# Altium PCB 数粒机接收板12通道.PcbDoc (part 2 of 2)
Units mm, origin at the board's own origin, x right, y up, seen from the top; angles counter-clockwise.
Board outline 316 x 52 mm, 2 copper layers (Top Layer, Bottom Layer); 209 components, 115 nets, 614 pads, 284 vias.
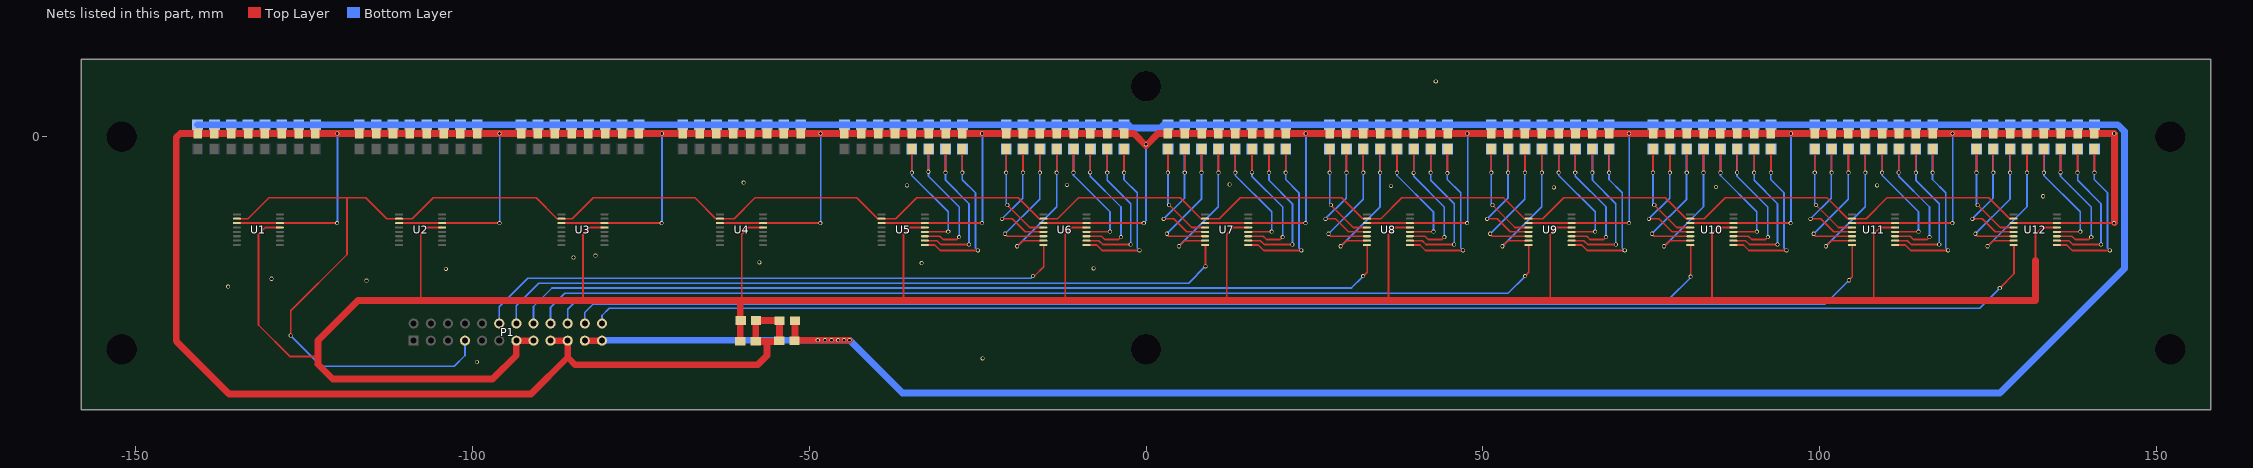
[diagram p2: the nets of this part, all layers, seen from the top]

## Via types
v1: diameter 0.6, hole 0.4, Top Layer to Bottom Layer, 284 vias

## Nets (pads, with @x,y where several pads share a name; then routed paths per layer and width w, separated by ;. In a path a pad name is that pad's centre, name@x,y a point inside that pad or via, vN(x,y) a via of type N, cw(c..) or ccw(c..) an arc to the next point about the centre after c; other vN are vias at no path point) (continued)
CH5-5: D37.1 R37.2 U5.12 | length 21.2
  Top Layer w0.254: v1(-34.75,-5.309) R37.2@-34.75,-1.8 ; U5.12@-32.776,-14.1 -29.371,-14.1 v1(-29.346,-14.076)
  Bottom Layer w0.254: D37.1@-34.745,-2.05 -34.745,-5.73 -29.346,-11.129 v1(-29.346,-14.076)
CH5-6: D38.1 R38.2 U5.11 | length 23.6
  Top Layer w0.254: U5.11@-32.776,-14.75 -30.602,-14.75 -30.108,-15.244 -28.076,-15.244 v1(-27.721,-14.888) ; v1(-32.309,-5.182) -32.309,-1.859 R38.2@-32.25,-1.8
  Bottom Layer w0.254: D38.1@-32.282,-2.013 -32.283,-2.015 -32.283,-5.855 -27.721,-10.418 v1(-27.721,-14.888)
CH5-7: D39.1 R39.2 U5.10 | length 25.6
  Top Layer w0.254: U5.10@-32.776,-15.4 -31.019,-15.4 -30.439,-15.981 v1(-26.273,-15.981) ; v1(-29.75,-5.309) R39.2@-29.75,-1.8
  Bottom Layer w0.254: D39.1@-29.742,-2.053 -29.742,-6.441 -26.273,-9.91 v1(-26.273,-15.981)
CH5-8: D40.1 R40.2 U5.9 | length 27.5
  Top Layer w0.254: U5.9@-32.776,-16.05 -31.334,-16.05 -30.515,-16.87 -24.978,-16.87 v1(-24.952,-16.844) ; v1(-27.25,-5.309) R40.2@-27.25,-1.8
  Bottom Layer w0.254: D40.1@-27.278,-2.017 -27.254,-2.041 -27.254,-6.363 -25.308,-8.31 -25.308,-16.489 v1(-24.952,-16.844)
CH6: P1.12 U6.8 | length 89
  Top Layer w0.254: v1(-16.759,-20.647) -16.556,-20.647 -15.176,-19.267 -15.176,-16.101 U6.8@-15.227,-16.05
  Bottom Layer w0.254: P1.12@-95.982,-27.708 -95.982,-25.219 -91.769,-21.006 -17.118,-21.006 v1(-16.759,-20.647)
CH6-1: D41.1 R41.2 U6.4 | length 18.6
  Top Layer w0.254: v1(-20.75,-5.309) R41.2@-20.75,-1.8 ; v1(-20.571,-10.111) -17.231,-13.45 U6.4@-15.227,-13.45
  Bottom Layer w0.254: D41.1@-20.75,-1.8 -20.75,-9.931 v1(-20.571,-10.111)
CH6-2: D42.1 R42.2 U6.5 | length 21.8
  Top Layer w0.254: v1(-21.374,-12.171) -19.875,-12.171 -17.946,-14.1 U6.5@-15.227,-14.1 ; v1(-18.25,-5.309) R42.2@-18.25,-1.8
  Bottom Layer w0.254: v1(-21.374,-12.171) -18.289,-9.086 D42.1@-18.289,-2.057
CH6-3: D43.1 R43.2 U6.6 | length 23.8
  Top Layer w0.254: v1(-20.917,-14.38) -20.917,-14.431 -20.598,-14.75 U6.6@-15.227,-14.75 ; v1(-15.75,-5.309) R43.2@-15.75,-1.8
  Bottom Layer w0.254: v1(-20.917,-14.38) -15.775,-9.238 D43.1@-15.775,-2.071
CH6-4: D44.1 R44.2 U6.7 | length 24.3
  Top Layer w0.254: v1(-19.113,-16.237) -18.276,-15.4 U6.7@-15.227,-15.4 ; v1(-13.25,-5.309) R44.2@-13.25,-1.8
  Bottom Layer w0.254: v1(-19.113,-16.237) -13.26,-10.383 D44.1@-13.26,-2.086
CH6-5: D45.1 R45.2 U6.12 | length 21.2
  Top Layer w0.254: v1(-10.75,-5.309) R45.2@-10.75,-1.8 ; U6.12@-8.776,-14.1 -5.371,-14.1 v1(-5.346,-14.076)
  Bottom Layer w0.254: D45.1@-10.745,-2.05 -10.745,-5.73 -5.346,-11.129 v1(-5.346,-14.076)
CH6-6: D46.1 R46.2 U6.11 | length 23.6
  Top Layer w0.254: U6.11@-8.776,-14.75 -6.602,-14.75 -6.108,-15.244 -4.076,-15.244 v1(-3.721,-14.888) ; v1(-8.28,-5.258) -8.28,-1.83 R46.2@-8.25,-1.8
  Bottom Layer w0.254: D46.1@-8.282,-2.013 -8.282,-5.857 -3.721,-10.418 v1(-3.721,-14.888)
CH6-7: D47.1 R47.2 U6.10 | length 25.6
  Top Layer w0.254: U6.10@-8.776,-15.4 -7.019,-15.4 -6.439,-15.981 v1(-2.273,-15.981) ; v1(-5.75,-5.309) R47.2@-5.75,-1.8
  Bottom Layer w0.254: D47.1@-5.742,-2.053 -5.742,-6.441 -2.273,-9.91 v1(-2.273,-15.981)
CH6-8: D48.1 R48.2 U6.9 | length 27.5
  Top Layer w0.254: U6.9@-8.776,-16.05 -7.334,-16.05 -6.515,-16.87 -0.978,-16.87 v1(-0.952,-16.844) ; v1(-3.25,-5.309) R48.2@-3.25,-1.8
  Bottom Layer w0.254: D48.1@-3.278,-2.017 -3.278,-6.34 -1.308,-8.31 -1.308,-16.489 v1(-0.952,-16.844)
CH7: P1.14 U7.8 | length 110.5
  Top Layer w0.254: U7.8@8.773,-16.05 8.824,-16.101 8.824,-18.292 8.819,-18.297 v1(8.819,-19.224)
  Bottom Layer w0.254: P1.14@-93.442,-27.708 -93.442,-25.041 -90.115,-21.714 6.329,-21.714 v1(8.819,-19.224)
CH7-1: D49.1 R49.2 U7.4 | length 18.6
  Top Layer w0.254: v1(3.25,-5.309) R49.2@3.25,-1.8 ; v1(3.429,-10.111) 6.769,-13.45 U7.4@8.773,-13.45
  Bottom Layer w0.254: D49.1@3.25,-1.8 3.25,-9.931 v1(3.429,-10.111)
CH7-2: D50.1 R50.2 U7.5 | length 21.8
  Top Layer w0.254: v1(2.626,-12.171) 4.125,-12.171 6.054,-14.1 U7.5@8.773,-14.1 ; v1(5.75,-5.309) R50.2@5.75,-1.8
  Bottom Layer w0.254: v1(2.626,-12.171) 5.711,-9.086 D50.1@5.711,-2.057
CH7-3: D51.1 R51.2 U7.6 | length 23.8
  Top Layer w0.254: v1(3.083,-14.38) 3.083,-14.431 3.402,-14.75 U7.6@8.773,-14.75 ; v1(8.25,-5.309) R51.2@8.25,-1.8
  Bottom Layer w0.254: v1(3.083,-14.38) 8.225,-9.238 D51.1@8.225,-2.071
CH7-4: D52.1 R52.2 U7.7 | length 24.3
  Top Layer w0.254: v1(4.887,-16.237) 5.724,-15.4 U7.7@8.773,-15.4 ; v1(10.75,-5.309) R52.2@10.75,-1.8
  Bottom Layer w0.254: v1(4.887,-16.237) 10.74,-10.383 D52.1@10.74,-2.086
CH7-5: D53.1 R53.2 U7.12 | length 21.2
  Top Layer w0.254: v1(13.25,-5.309) R53.2@13.25,-1.8 ; U7.12@15.224,-14.1 18.629,-14.1 v1(18.654,-14.076)
  Bottom Layer w0.254: D53.1@13.255,-2.05 13.255,-5.73 18.654,-11.129 v1(18.654,-14.076)
CH7-6: D54.1 R54.2 U7.11 | length 23.6
  Top Layer w0.254: U7.11@15.224,-14.75 17.398,-14.75 17.892,-15.244 19.924,-15.244 v1(20.279,-14.888) ; v1(15.723,-5.258) 15.723,-1.827 R54.2@15.75,-1.8
  Bottom Layer w0.254: D54.1@15.718,-2.013 15.718,-5.857 20.279,-10.418 v1(20.279,-14.888)
CH7-7: D55.1 R55.2 U7.10 | length 25.6
  Top Layer w0.254: U7.10@15.224,-15.4 16.981,-15.4 17.561,-15.981 v1(21.727,-15.981) ; v1(18.25,-5.309) R55.2@18.25,-1.8
  Bottom Layer w0.254: D55.1@18.258,-2.053 18.258,-6.441 21.727,-9.91 v1(21.727,-15.981)
CH7-8: D56.1 R56.2 U7.9 | length 27.5
  Top Layer w0.254: U7.9@15.224,-16.05 16.666,-16.05 17.485,-16.87 23.022,-16.87 v1(23.048,-16.844) ; v1(20.726,-5.309) 20.726,-1.824 R56.2@20.75,-1.8
  Bottom Layer w0.254: D56.1@20.722,-2.017 20.722,-6.34 22.692,-8.31 22.692,-16.489 v1(23.048,-16.844)
CH8: P1.16 U8.8 | length 132.4
  Top Layer w0.254: v1(32.237,-20.672) 32.824,-20.086 32.824,-16.101 U8.8@32.773,-16.05
  Bottom Layer w0.254: P1.16@-90.902,-27.708 -90.902,-25.168 -88.159,-22.425 30.485,-22.425 v1(32.237,-20.672)
CH8-1: D57.1 R57.2 U8.4 | length 18.6
  Top Layer w0.254: v1(27.25,-5.309) R57.2@27.25,-1.8 ; v1(27.429,-10.111) 30.769,-13.45 U8.4@32.773,-13.45
  Bottom Layer w0.254: D57.1@27.25,-1.8 27.25,-9.931 v1(27.429,-10.111)
CH8-2: D58.1 R58.2 U8.5 | length 21.8
  Top Layer w0.254: v1(26.626,-12.171) 28.125,-12.171 30.054,-14.1 U8.5@32.773,-14.1 ; v1(29.75,-5.309) R58.2@29.75,-1.8
  Bottom Layer w0.254: v1(26.626,-12.171) 29.711,-9.086 D58.1@29.711,-2.057
CH8-3: D59.1 R59.2 U8.6 | length 23.8
  Top Layer w0.254: v1(27.083,-14.38) 27.083,-14.431 27.402,-14.75 U8.6@32.773,-14.75 ; v1(32.25,-5.309) R59.2@32.25,-1.8
  Bottom Layer w0.254: v1(27.083,-14.38) 32.225,-9.238 D59.1@32.225,-2.071
CH8-4: D60.1 R60.2 U8.7 | length 24.3
  Top Layer w0.254: v1(28.887,-16.237) 29.724,-15.4 U8.7@32.773,-15.4 ; v1(34.75,-5.309) R60.2@34.75,-1.8
  Bottom Layer w0.254: v1(28.887,-16.237) 34.74,-10.383 D60.1@34.74,-2.086
CH8-5: D61.1 R61.2 U8.12 | length 21.2
  Top Layer w0.254: v1(37.25,-5.309) R61.2@37.25,-1.8 ; U8.12@39.224,-14.1 42.629,-14.1 v1(42.654,-14.076)
  Bottom Layer w0.254: D61.1@37.255,-2.05 37.255,-5.73 42.654,-11.129 v1(42.654,-14.076)
CH8-6: D62.1 R62.2 U8.11 | length 23.7
  Top Layer w0.254: U8.11@39.224,-14.75 41.398,-14.75 41.892,-15.244 43.924,-15.244 v1(44.279,-14.888) ; v1(39.726,-5.334) 39.726,-1.824 R62.2@39.75,-1.8
  Bottom Layer w0.254: D62.1@39.718,-2.013 39.718,-5.857 44.279,-10.418 v1(44.279,-14.888)
CH8-7: D63.1 R63.2 U8.10 | length 25.6
  Top Layer w0.254: U8.10@39.224,-15.4 40.981,-15.4 41.561,-15.981 v1(45.727,-15.981) ; v1(42.25,-5.309) R63.2@42.25,-1.8
  Bottom Layer w0.254: D63.1@42.258,-2.053 42.258,-6.441 45.727,-9.91 v1(45.727,-15.981)
CH8-8: D64.1 R64.2 U8.9 | length 27.6
  Top Layer w0.254: U8.9@39.224,-16.05 40.666,-16.05 41.485,-16.87 47.022,-16.87 v1(47.048,-16.844) ; v1(44.729,-5.385) 44.729,-1.821 R64.2@44.75,-1.8
  Bottom Layer w0.254: D64.1@44.722,-2.017 44.722,-6.34 46.692,-8.31 46.692,-16.489 v1(47.048,-16.844)
CH9: P1.18 U9.8 | length 153.8
  Top Layer w0.254: v1(56.266,-20.672) 56.824,-20.114 56.824,-16.101 U9.8@56.773,-16.05
  Bottom Layer w0.254: P1.18@-88.362,-27.708 -88.362,-25.295 -86.279,-23.212 53.726,-23.212 v1(56.266,-20.672)
CH9-1: D65.1 R65.2 U9.4 | length 18.6
  Top Layer w0.254: v1(51.242,-5.309) R65.2@51.242,-1.8 ; v1(51.429,-10.111) 54.769,-13.45 U9.4@56.773,-13.45
  Bottom Layer w0.254: D65.1@51.25,-1.8 51.25,-9.931 v1(51.429,-10.111)
CH9-2: D66.1 R66.2 U9.5 | length 21.8
  Top Layer w0.254: v1(50.626,-12.171) 52.125,-12.171 54.054,-14.1 U9.5@56.773,-14.1 ; v1(53.742,-5.309) R66.2@53.742,-1.8
  Bottom Layer w0.254: v1(50.626,-12.171) 53.711,-9.086 D66.1@53.711,-2.057
CH9-3: D67.1 R67.2 U9.6 | length 23.8
  Top Layer w0.254: v1(51.083,-14.38) 51.083,-14.431 51.402,-14.75 U9.6@56.773,-14.75 ; v1(56.242,-5.309) R67.2@56.242,-1.8
  Bottom Layer w0.254: v1(51.083,-14.38) 56.225,-9.238 D67.1@56.225,-2.071
CH9-4: D68.1 R68.2 U9.7 | length 24.3
  Top Layer w0.254: v1(52.887,-16.237) 53.724,-15.4 U9.7@56.773,-15.4 ; v1(58.742,-5.309) R68.2@58.742,-1.8
  Bottom Layer w0.254: v1(52.887,-16.237) 58.74,-10.383 D68.1@58.74,-2.086
CH9-5: D69.1 R69.2 U9.12 | length 21.2
  Top Layer w0.254: v1(61.242,-5.309) R69.2@61.242,-1.8 ; U9.12@63.224,-14.1 66.629,-14.1 v1(66.654,-14.076)
  Bottom Layer w0.254: D69.1@61.255,-2.05 61.255,-5.73 66.654,-11.129 v1(66.654,-14.076)
CH9-6: D70.1 R70.2 U9.11 | length 23.7
  Top Layer w0.254: U9.11@63.224,-14.75 65.398,-14.75 65.892,-15.244 67.924,-15.244 v1(68.279,-14.888) ; v1(63.703,-5.309) 63.703,-1.839 R70.2@63.742,-1.8
  Bottom Layer w0.254: D70.1@63.718,-2.013 63.718,-5.857 68.279,-10.418 v1(68.279,-14.888)
CH9-7: D71.1 R71.2 U9.10 | length 25.6
  Top Layer w0.254: U9.10@63.224,-15.4 64.981,-15.4 65.561,-15.981 v1(69.727,-15.981) ; v1(66.242,-5.309) R71.2@66.242,-1.8
  Bottom Layer w0.254: D71.1@66.258,-2.053 66.258,-6.441 69.727,-9.91 v1(69.727,-15.981)
CH9-8: D72.1 R72.2 U9.9 | length 27.5
  Top Layer w0.254: U9.9@63.224,-16.05 64.666,-16.05 65.485,-16.87 71.022,-16.87 v1(71.048,-16.844) ; v1(68.742,-5.309) R72.2@68.742,-1.8
  Bottom Layer w0.254: D72.1@68.722,-2.017 68.722,-6.34 70.692,-8.31 70.692,-16.489 v1(71.048,-16.844)
CH10: P1.20 U10.8 | length 175.7
  Top Layer w0.254: U10.8@80.773,-16.05 80.824,-16.101 v1(80.824,-20.745) v1@80.904,-20.825
  Bottom Layer w0.254: P1.20@-85.822,-27.708 -85.822,-25.6 -84.272,-24.05 77.678,-24.05 80.853,-20.875 80.853,-20.774 v1(80.824,-20.745)
CH10-1: D73.1 R73.2 U10.4 | length 18.6
  Top Layer w0.254: v1(75.25,-5.309) R73.2@75.25,-1.8 ; v1(75.429,-10.111) 78.769,-13.45 U10.4@80.773,-13.45
  Bottom Layer w0.254: D73.1@75.25,-1.8 75.25,-9.931 v1(75.429,-10.111)
CH10-2: D74.1 R74.2 U10.5 | length 21.8
  Top Layer w0.254: v1(74.626,-12.171) 76.125,-12.171 78.054,-14.1 U10.5@80.773,-14.1 ; v1(77.75,-5.309) R74.2@77.75,-1.8
  Bottom Layer w0.254: v1(74.626,-12.171) 77.711,-9.086 D74.1@77.711,-2.057
CH10-3: D75.1 R75.2 U10.6 | length 23.8
  Top Layer w0.254: v1(75.083,-14.38) 75.083,-14.431 75.402,-14.75 U10.6@80.773,-14.75 ; v1(80.25,-5.309) R75.2@80.25,-1.8
  Bottom Layer w0.254: v1(75.083,-14.38) 80.225,-9.238 D75.1@80.225,-2.071
CH10-4: D76.1 R76.2 U10.7 | length 24.3
  Top Layer w0.254: v1(76.887,-16.237) 77.724,-15.4 U10.7@80.773,-15.4 ; v1(82.75,-5.309) R76.2@82.75,-1.8
  Bottom Layer w0.254: v1(76.887,-16.237) 82.74,-10.383 D76.1@82.74,-2.086
CH10-5: D77.1 R77.2 U10.12 | length 21.2
  Top Layer w0.254: v1(85.25,-5.309) R77.2@85.25,-1.8 ; U10.12@87.224,-14.1 90.629,-14.1 v1(90.654,-14.076)
  Bottom Layer w0.254: D77.1@85.255,-2.05 85.255,-5.73 90.654,-11.129 v1(90.654,-14.076)
CH10-6: D78.1 R78.2 U10.11 | length 23.7
  Top Layer w0.254: U10.11@87.224,-14.75 89.398,-14.75 89.892,-15.244 91.924,-15.244 v1(92.279,-14.888) ; v1(87.732,-5.283) 87.732,-1.818 R78.2@87.75,-1.8
  Bottom Layer w0.254: D78.1@87.718,-2.013 87.718,-5.857 92.279,-10.418 v1(92.279,-14.888)
CH10-7: D79.1 R79.2 U10.10 | length 25.6
  Top Layer w0.254: U10.10@87.224,-15.4 88.981,-15.4 89.561,-15.981 v1(93.727,-15.981) ; v1(90.25,-5.309) R79.2@90.25,-1.8
  Bottom Layer w0.254: D79.1@90.258,-2.053 90.258,-6.441 93.727,-9.91 v1(93.727,-15.981)
CH10-8: D80.1 R80.2 U10.9 | length 27.5
  Top Layer w0.254: U10.9@87.224,-16.05 88.666,-16.05 89.485,-16.87 95.022,-16.87 v1(95.048,-16.844) ; v1(92.75,-5.309) R80.2@92.75,-1.8
  Bottom Layer w0.254: D80.1@92.722,-2.017 92.722,-6.34 94.692,-8.31 94.692,-16.489 v1(95.048,-16.844)
CH11: P1.22 U11.8 | length 196.7
  Top Layer w0.254: v1(104.323,-21.282) 104.824,-20.781 104.824,-16.101 U11.8@104.773,-16.05
  Bottom Layer w0.254: P1.22@-83.282,-27.708 -83.282,-26.057 -82.037,-24.812 100.792,-24.812 v1(104.323,-21.282)
CH11-1: D81.1 R81.2 U11.4 | length 18.6
  Top Layer w0.254: v1(99.25,-5.309) R81.2@99.25,-1.8 ; v1(99.429,-10.111) 102.769,-13.45 U11.4@104.773,-13.45
  Bottom Layer w0.254: D81.1@99.25,-1.8 99.25,-9.931 v1(99.429,-10.111)
CH11-2: D82.1 R82.2 U11.5 | length 21.8
  Top Layer w0.254: v1(98.626,-12.171) 100.125,-12.171 102.054,-14.1 U11.5@104.773,-14.1 ; v1(101.75,-5.309) R82.2@101.75,-1.8
  Bottom Layer w0.254: v1(98.626,-12.171) 101.711,-9.086 D82.1@101.711,-2.057
CH11-3: D83.1 R83.2 U11.6 | length 23.8
  Top Layer w0.254: v1(99.083,-14.38) 99.083,-14.431 99.402,-14.75 U11.6@104.773,-14.75 ; v1(104.25,-5.309) R83.2@104.25,-1.8
  Bottom Layer w0.254: v1(99.083,-14.38) 104.225,-9.238 D83.1@104.225,-2.071
CH11-4: D84.1 R84.2 U11.7 | length 24.3
  Top Layer w0.254: v1(100.887,-16.237) 101.724,-15.4 U11.7@104.773,-15.4 ; v1(106.75,-5.309) R84.2@106.75,-1.8
  Bottom Layer w0.254: v1(100.887,-16.237) 106.74,-10.383 D84.1@106.74,-2.086
CH11-5: D85.1 R85.2 U11.12 | length 21.2
  Top Layer w0.254: v1(109.25,-5.309) R85.2@109.25,-1.8 ; U11.12@111.224,-14.1 114.629,-14.1 v1(114.654,-14.076)
  Bottom Layer w0.254: D85.1@109.255,-2.05 109.255,-5.73 114.654,-11.129 v1(114.654,-14.076)
CH11-6: D86.1 R86.2 U11.11 | length 23.7
  Top Layer w0.254: U11.11@111.224,-14.75 113.398,-14.75 113.892,-15.244 115.924,-15.244 v1(116.279,-14.888) ; v1(111.709,-5.283) 111.709,-1.841 R86.2@111.75,-1.8
  Bottom Layer w0.254: D86.1@111.718,-2.013 111.718,-5.857 116.279,-10.418 v1(116.279,-14.888)
CH11-7: D87.1 R87.2 U11.10 | length 25.6
  Top Layer w0.254: U11.10@111.224,-15.4 112.981,-15.4 113.561,-15.981 v1(117.727,-15.981) ; v1(114.25,-5.309) R87.2@114.25,-1.8
  Bottom Layer w0.254: D87.1@114.258,-2.053 114.258,-6.441 117.727,-9.91 v1(117.727,-15.981)
CH11-8: D88.1 R88.2 U11.9 | length 27.5
  Top Layer w0.254: U11.9@111.224,-16.05 112.666,-16.05 113.485,-16.87 119.022,-16.87 v1(119.048,-16.844) ; v1(116.75,-5.309) R88.2@116.75,-1.8
  Bottom Layer w0.254: D88.1@116.722,-2.017 116.722,-6.34 118.692,-8.31 118.692,-16.489 v1(119.048,-16.844)
CH12: P1.24 U12.8 | length 217.6
  Top Layer w0.254: v1(126.7,-22.45) 128.824,-20.326 128.824,-16.101 U12.8@128.773,-16.05
  Bottom Layer w0.254: P1.24@-80.742,-27.708 -80.742,-26.514 -79.653,-25.425 123.725,-25.425 v1(126.7,-22.45)
CH12-1: D89.1 R89.2 U12.4 | length 18.6
  Top Layer w0.254: v1(123.25,-5.309) R89.2@123.25,-1.8 ; v1(123.429,-10.111) 126.769,-13.45 U12.4@128.773,-13.45
  Bottom Layer w0.254: D89.1@123.25,-1.8 123.25,-9.931 v1(123.429,-10.111)
CH12-2: D90.1 R90.2 U12.5 | length 21.8
  Top Layer w0.254: v1(122.626,-12.171) 124.125,-12.171 126.054,-14.1 U12.5@128.773,-14.1 ; v1(125.75,-5.309) R90.2@125.75,-1.8
  Bottom Layer w0.254: v1(122.626,-12.171) 125.711,-9.086 D90.1@125.711,-2.057
CH12-3: D91.1 R91.2 U12.6 | length 23.8
  Top Layer w0.254: v1(123.083,-14.38) 123.083,-14.431 123.402,-14.75 U12.6@128.773,-14.75 ; v1(128.25,-5.309) R91.2@128.25,-1.8
  Bottom Layer w0.254: v1(123.083,-14.38) 128.225,-9.238 D91.1@128.225,-2.071
CH12-4: D92.1 R92.2 U12.7 | length 24.3
  Top Layer w0.254: v1(124.887,-16.237) 125.724,-15.4 U12.7@128.773,-15.4 ; v1(130.75,-5.309) R92.2@130.75,-1.8
  Bottom Layer w0.254: v1(124.887,-16.237) 130.74,-10.383 D92.1@130.74,-2.086
CH12-5: D93.1 R93.2 U12.12 | length 21.2
  Top Layer w0.254: v1(133.25,-5.309) R93.2@133.25,-1.8 ; U12.12@135.224,-14.1 138.629,-14.1 v1(138.654,-14.076)
  Bottom Layer w0.254: D93.1@133.255,-2.05 133.255,-5.73 138.654,-11.129 v1(138.654,-14.076)
CH12-6: D94.1 R94.2 U12.11 | length 23.6
  Top Layer w0.254: U12.11@135.224,-14.75 137.398,-14.75 137.892,-15.244 139.924,-15.244 v1(140.279,-14.888) ; v1(135.712,-5.258) 135.712,-1.838 R94.2@135.75,-1.8
  Bottom Layer w0.254: D94.1@135.718,-2.013 135.718,-5.857 140.279,-10.418 v1(140.279,-14.888)
CH12-7: D95.1 R95.2 U12.10 | length 25.6
  Top Layer w0.254: U12.10@135.224,-15.4 136.981,-15.4 137.561,-15.981 v1(141.727,-15.981) ; v1(138.25,-5.309) R95.2@138.25,-1.8
  Bottom Layer w0.254: D95.1@138.258,-2.053 138.258,-6.441 141.727,-9.91 v1(141.727,-15.981)
CH12-8: D96.1 R96.2 U12.9 | length 27.5
  Top Layer w0.254: U12.9@135.224,-16.05 136.666,-16.05 137.485,-16.87 143.022,-16.87 v1(143.048,-16.844) ; v1(140.75,-5.309) R96.2@140.75,-1.8
  Bottom Layer w0.254: D96.1@140.722,-2.017 140.722,-6.34 142.692,-8.31 142.692,-16.489 v1(143.048,-16.844)
EN: P1.7 U1.2 U2.2 U3.2 U4.2 U5.2 U6.2 U7.2 U8.2 U9.2 U10.2 U11.2 U12.2 | length 346.5
  Top Layer w0.254: U1.2@-134.931,-12.15 -133.26,-12.15 -130.156,-9.047 -118.624,-9.047 ; v1(-126.93,-29.493) -126.93,-25.814 -118.574,-17.458 -118.574,-9.097 -118.624,-9.047 ; U12.2@128.773,-12.15 128.168,-12.15 125.065,-9.047 109.977,-9.047 106.873,-12.15 U11.2@104.773,-12.15 104.168,-12.15 101.065,-9.047 85.977,-9.047 82.873,-12.15 U10.2@80.773,-12.15 80.168,-12.15 77.065,-9.047 61.977,-9.047 58.873,-12.15 U9.2@56.773,-12.15 56.168,-12.15 53.065,-9.047 37.977,-9.047 34.873,-12.15 U8.2@32.773,-12.15 32.168,-12.15 29.065,-9.047 13.977,-9.047 10.873,-12.15 U7.2@8.773,-12.15 8.168,-12.15 5.065,-9.047 -10.023,-9.047 -13.127,-12.15 U6.2@-15.227,-12.15 -15.832,-12.15 -18.935,-9.047 -34.023,-9.047 -37.127,-12.15 U5.2@-39.227,-12.15 -39.832,-12.15 -42.935,-9.047 -58.023,-9.047 -61.127,-12.15 U4.2@-63.227,-12.15 -63.832,-12.15 -66.935,-9.047 -82.023,-9.047 -85.127,-12.15 U3.2@-86.773,-12.15 -87.403,-12.15 -90.506,-9.047 -105.772,-9.047 -108.876,-12.15 U2.2@-110.852,-12.15 -112.676,-12.15 -115.779,-9.047 -118.624,-9.047
  Bottom Layer w0.254: v1(-126.93,-29.493) -122.391,-34.033 -102.637,-34.033 -101.062,-32.458 P1.7@-101.062,-30.248
GND: C1.1 C2.1 C3.1 C4.1 P1.17 P1.19 R1.1 R2.1 R3.1 R4.1 R5.1 R6.1 R7.1 R8.1 R9.1 R10.1 R11.1 R12.1 R13.1 R14.1 R15.1 R16.1 R17.1 R18.1 R19.1 R20.1 R21.1 R22.1 R23.1 R24.1 R25.1 R26.1 R27.1 R28.1 R29.1 R30.1 R31.1 R32.1 R33.1 R34.1 R35.1 R36.1 R37.1 R38.1 R39.1 R40.1 R41.1 R42.1 R43.1 R44.1 R45.1 R46.1 R47.1 R48.1 R49.1 R50.1 R51.1 R52.1 R53.1 R54.1 R55.1 R56.1 R57.1 R58.1 R59.1 R60.1 R61.1 R62.1 R63.1 R64.1 R65.1 R66.1 R67.1 R68.1 R69.1 R70.1 R71.1 R72.1 R73.1 R74.1 R75.1 R76.1 R77.1 R78.1 R79.1 R80.1 R81.1 R82.1 R83.1 R84.1 R85.1 R86.1 R87.1 R88.1 R89.1 R90.1 R91.1 R92.1 R93.1 R94.1 R95.1 R96.1 U1.3 U1.14 U2.3 U2.14 U3.3 U3.14 U4.3 U4.14 U5.3 U5.14 U6.3 U6.14 U7.3 U7.14 U8.3 U8.14 U9.3 U9.14 U10.3 U10.14 U11.3 U11.14 U12.3 U12.14 | length 770.8
  Top Layer w0.254: U1.3@-134.931,-12.8 v1(-120.036,-12.8) ; U2.3@-110.852,-12.8 v1(-95.956,-12.8) ; U3.3@-86.773,-12.8 v1(-71.877,-12.8) ; U4.3@-63.227,-12.8 v1(-48.331,-12.8) ; U5.3@-39.227,-12.8 v1(-24.331,-12.8) ; U6.3@-15.227,-12.8 U6.14@-8.827,-12.8 v1(-0.331,-12.8) ; U7.3@8.773,-12.8 v1(23.669,-12.8) ; U8.3@32.773,-12.8 v1(47.669,-12.8) ; U9.3@56.773,-12.8 v1(71.669,-12.8) ; U10.3@80.773,-12.8 v1(95.669,-12.8) ; U11.3@104.773,-12.8 v1(119.669,-12.8) ; U12.3@128.773,-12.8 U12.14@135.173,-12.8 v1(143.669,-12.8)
  Top Layer w1: P1.17@-88.362,-30.248 P1.19@-85.822,-30.248 -85.822,-32.712 ; C2.1@-57.868,-27.258 -54.413,-27.258 C4.1@-54.388,-27.284 -54.388,-30.179 -54.566,-30.357 -56.256,-30.357 ; C2.1@-57.856,-27.276 -57.918,-27.338 C1.1@-57.918,-30.357 -56.256,-30.357 ; v1(143.694,0.486) R96.1@140.75,0.486 R95.1@138.25,0.486 R94.1@135.75,0.486 R93.1@133.25,0.486 R92.1@130.75,0.486 R91.1@128.25,0.486 R90.1@125.75,0.486 R89.1@123.25,0.486 R88.1@116.75,0.486 R87.1@114.25,0.486 R86.1@111.75,0.486 R85.1@109.25,0.486 R84.1@106.75,0.486 R83.1@104.25,0.486 R82.1@101.75,0.486 R81.1@99.25,0.486 R80.1@92.75,0.486 R79.1@90.25,0.486 R78.1@87.75,0.486 R77.1@85.25,0.486 R76.1@82.75,0.486 R75.1@80.25,0.486 R74.1@77.75,0.486 R73.1@75.25,0.486 R72.1@68.742,0.486 R71.1@66.242,0.486 R70.1@63.742,0.486 R69.1@61.242,0.486 R68.1@58.742,0.486 R67.1@56.242,0.486 R66.1@53.742,0.486 R65.1@51.242,0.486 R64.1@44.75,0.486 R63.1@42.25,0.486 R62.1@39.75,0.486 R61.1@37.25,0.486 R60.1@34.75,0.486 R59.1@32.25,0.486 R58.1@29.75,0.486 R57.1@27.25,0.486 R56.1@20.75,0.486 R55.1@18.25,0.486 R54.1@15.75,0.486 R53.1@13.25,0.486 R52.1@10.75,0.486 R51.1@8.25,0.486 R50.1@5.75,0.486 R49.1@3.25,0.486 1.807,0.486 0,-1.321 -1.807,0.486 R48.1@-3.25,0.486 R47.1@-5.75,0.486 R46.1@-8.25,0.486 R45.1@-10.75,0.486 R44.1@-13.25,0.486 R43.1@-15.75,0.486 R42.1@-18.25,0.486 R41.1@-20.75,0.486 R40.1@-27.25,0.486 R39.1@-29.75,0.486 R38.1@-32.25,0.486 R37.1@-34.75,0.486 R36.1@-37.25,0.486 R35.1@-39.75,0.486 R34.1@-42.25,0.486 R33.1@-44.75,0.486 R32.1@-51.25,0.486 R31.1@-53.75,0.486 R30.1@-56.25,0.486 R29.1@-58.75,0.486 R28.1@-61.25,0.486 R27.1@-63.75,0.486 R26.1@-66.25,0.486 R25.1@-68.75,0.486 R24.1@-75.25,0.486 R23.1@-77.75,0.486 R22.1@-80.25,0.486 R21.1@-82.75,0.486 R20.1@-85.25,0.486 R19.1@-87.75,0.486 R18.1@-90.25,0.486 R17.1@-92.75,0.486 R16.1@-99.25,0.486 R15.1@-101.75,0.486 R14.1@-104.25,0.486 R13.1@-106.75,0.486 R12.1@-109.25,0.486 R11.1@-111.75,0.486 R10.1@-114.25,0.486 R9.1@-116.75,0.486 R8.1@-123.258,0.486 R7.1@-125.758,0.486 R6.1@-128.258,0.486 R5.1@-130.758,0.486 R4.1@-133.258,0.486 R3.1@-135.758,0.486 R2.1@-138.258,0.486 R1.1@-140.758,0.486 -143.327,0.486 -143.937,-0.124 -143.937,-30.273 -136.063,-38.147 -91.257,-38.147 -85.822,-32.712 ; v1@143.732,-12.737 v1@143.732,0.448 ; -85.822,-32.712 -84.704,-33.829 -57.628,-33.829 -56.256,-32.458 -56.256,-30.357
  Bottom Layer w0.254: v1(-120.036,-12.8) -119.972,-12.737 -119.972,0.448 v1(-120.01,0.486) ; v1(-95.956,-12.8) -95.893,-12.737 v1@-95.893,0.448 ; v1(-71.877,-12.8) -71.814,-12.737 v1@-71.814,0.448 ; v1(-48.331,-12.8) -48.268,-12.737 v1@-48.268,0.448 ; v1(-24.331,-12.8) -24.268,-12.737 v1@-24.268,0.448 ; v1(-0.331,-12.8) 0,-12.469 0,-1.309 v1@-0.268,-1.041 ; v1(23.669,-12.8) 23.732,-12.737 v1@23.732,0.448 ; v1(47.669,-12.8) 47.732,-12.737 v1@47.732,0.448 ; v1(71.669,-12.8) 71.732,-12.737 v1@71.732,0.448 ; v1(95.669,-12.8) 95.732,-12.737 v1@95.732,0.448 ; v1(119.669,-12.8) 119.732,-12.737 v1@119.732,0.448 ; v1(143.669,-12.8) v1@143.732,-12.737
  other v1: -99.314,-33.401 -24.232,-32.868 -136.22,-22.225 -115.697,-21.336 -129.769,-21.057 -103.911,-19.583 -7.772,-19.507 -33.299,-18.745 -57.379,-18.618 -84.963,-17.907 -81.686,-17.628 133.147,-8.814 60.528,-7.493 84.582,-7.442 36.373,-7.264 -35.484,-7.188 108.509,-7.188 -11.735,-7.112 12.421,-7.061 -59.715,-6.807 0,-1.118 -95.931,0.486 -71.852,0.486 -48.306,0.486 -24.306,0.486 23.694,0.486 47.694,0.486 71.694,0.486 95.694,0.486 119.694,0.486 43.002,8.23
VCC3.3: C3.2 C4.2 D1.2 D2.2 D3.2 D4.2 D5.2 D6.2 D7.2 D8.2 D9.2 D10.2 D11.2 D12.2 D13.2 D14.2 D15.2 D16.2 D17.2 D18.2 D19.2 D20.2 D21.2 D22.2 D23.2 D24.2 D25.2 D26.2 D27.2 D28.2 D29.2 D30.2 D31.2 D32.2 D33.2 D34.2 D35.2 D36.2 D37.2 D38.2 D39.2 D40.2 D41.2 D42.2 D43.2 D44.2 D45.2 D46.2 D47.2 D48.2 D49.2 D50.2 D51.2 D52.2 D53.2 D54.2 D55.2 D56.2 D57.2 D58.2 D59.2 D60.2 D61.2 D62.2 D63.2 D64.2 D65.2 D66.2 D67.2 D68.2 D69.2 D70.2 D71.2 D72.2 D73.2 D74.2 D75.2 D76.2 D77.2 D78.2 D79.2 D80.2 D81.2 D82.2 D83.2 D84.2 D85.2 D86.2 D87.2 D88.2 D89.2 D90.2 D91.2 D92.2 D93.2 D94.2 D95.2 D96.2 P1.21 P1.23 | length 557.6
  Top Layer w1: P1.21@-83.282,-30.248 P1.23@-80.742,-30.248 ; C3.2@-52.153,-30.23 -52.094,-30.172 v1(-48.712,-30.172) v1(-47.646,-30.172) v1(-46.68,-30.172) v1(-45.69,-30.172) v1(-44.826,-30.172) v1(-44.013,-30.172) ; C3.2@-52.102,-30.179 C4.2@-52.102,-27.284
  Bottom Layer w1: D1.2@-140.75,1.8 -2.612,1.8 -2.132,1.32 2.132,1.32 2.612,1.8 144.233,1.8 145.217,0.816 145.217,-19.529 126.722,-38.024 -36.161,-38.024 v1(-44.013,-30.172) v1(-44.826,-30.172) v1(-45.69,-30.172) v1(-46.68,-30.172) v1(-47.646,-30.172) v1(-48.712,-30.172) -80.666,-30.172 P1.23@-80.742,-30.248
VCC5V: C1.2 C2.2 P1.13 P1.15 U1.13 U2.13 U3.13 U4.13 U5.13 U6.13 U7.13 U8.13 U9.13 U10.13 U11.13 U12.13 | length 479
  Top Layer w0.254: U1.13@-128.531,-13.45 -130.724,-13.45 -131.705,-14.431 -131.705,-27.925 -127.021,-32.61 -122.906,-32.61 ; -107.626,-24.279 -107.626,-14.431 -106.645,-13.45 U2.13@-104.452,-13.45 ; -83.547,-24.279 -83.547,-14.431 -82.566,-13.45 U3.13@-80.373,-13.45 ; -60.001,-24.279 -60.001,-14.431 -59.02,-13.45 U4.13@-56.827,-13.45 ; -36.001,-24.279 -36.001,-14.431 -35.02,-13.45 U5.13@-32.827,-13.45 ; -12.001,-24.279 -12.001,-14.431 -11.02,-13.45 U6.13@-8.827,-13.45 ; 11.999,-24.279 11.999,-14.431 12.98,-13.45 U7.13@15.173,-13.45 ; 35.999,-24.279 35.999,-14.431 36.98,-13.45 U8.13@39.173,-13.45 ; 59.999,-24.279 59.999,-14.431 60.98,-13.45 U9.13@63.173,-13.45 ; 83.999,-24.279 83.999,-14.431 84.98,-13.45 U10.13@87.173,-13.45 ; 107.955,-24.279 107.999,-24.235 107.999,-14.431 108.98,-13.45 U11.13@111.173,-13.45 ; 131.999,-18.343 131.999,-14.431 132.98,-13.45 U12.13@135.173,-13.45
  Top Layer w1: P1.15@-90.902,-30.248 P1.13@-93.442,-30.248 -93.442,-32.407 -96.972,-35.938 -120.696,-35.938 -122.892,-33.742 -122.892,-30.208 -116.962,-24.279 -107.626,-24.279 -83.547,-24.279 -60.219,-24.279 ; C1.2@-60.204,-30.357 -60.204,-24.293 -60.219,-24.279 ; 131.999,-18.343 131.999,-24.279 107.955,-24.279 83.999,-24.279 59.999,-24.279 35.999,-24.279 11.999,-24.279 -12.001,-24.279 -36.001,-24.279 -60.001,-24.279 -60.219,-24.279
pads on no net: P1.9 P1.11

## Polygon pours and split planes (outlines as drawn)
GND on Top Layer "TopOverlay-No Net" (hatched 90Degree grid 0.508 track 0.254, remove dead copper, pour order 1000): -158,-40.5 158,-40.5 158,11.5 -158,11.5
GND on Bottom Layer "TopOverlay-No Net" (hatched 90Degree grid 0.508 track 0.254, remove dead copper, pour order 1001): -158,-40.5 158,-40.5 158,11.5 -158,11.5

## Keep-outs
Keep-Out Layer:
  circle w0.254: c-152,0 r5.461
  circle w0.254: c-152,-31.5 r5.461
  circle w0.254: c152,-31.5 r5.461
  circle w0.254: c152,0 r5.461
  circle w0.254: c0,-31.5 r5.461
  circle w0.254: c0,7.5 r5
  lines w0.254: -158,-40.5 -158,11.5 158,11.5 158,-40.5 -158,-40.5

## Silkscreen, mask and mechanical layers (free items; w line width, h text height)
Top Overlay:
  circle w0.254: c0,7.5 r2.25
  circle w0.254: c0,-31.5 r2.25
  circle w0.254: c152,0 r2.25
  circle w0.254: c152,-31.5 r2.25
  circle w0.254: c-152,0 r2.25
  circle w0.254: c-152,-31.5 r2.25
  lines w0.254: -146.936,-38.847 -146.936,9.513 146.865,9.513 ; -146.928,-38.856 146.865,-38.856 146.865,9.504 ; -97.333,-31.5 -97.384,-31.5 -97.384,-32.69 -120.574,-32.69 -120.574,-23.978 -69.012,-23.978 -69.012,-32.69 -92.888,-32.69 -92.888,-31.518
  text "JIESHOU-V1" at -30.182,-27.834 h1.2
  text "2017-06-01" at -24.181,-29.693 h1.1
Bottom Overlay:
  lines w0.254: -143,0 -132,0 -121,0 ; -119,0 -108,0 -97,0 ; -95,0 -84,0 -73,0 ; -71,0 -60,0 -49,0 ; -47,0 -36,0 -25,0 ; -23,0 -12,0 -1,0 0,0 ; 1,0 12,0 23,0 ; 25,0 36,0 47,0 ; 49,0 60,0 71,0 ; 73,0 84,0 95,0 ; 97,0 108,0 119,0 ; 121,0 132,0 143,0 ; -143,-4.5 -121,-4.5 -121,4.5 -143,4.5 -143,-4.5 ; -119,-4.5 -97,-4.5 -97,4.5 -119,4.5 -119,-4.5 ; -95,-4.5 -73,-4.5 -73,4.5 -95,4.5 -95,-4.5 ; -71,-4.5 -49,-4.5 -49,4.5 -71,4.5 -71,-4.5 ; -47,-4.5 -25,-4.5 -25,4.5 -47,4.5 -47,-4.5 ; -23,-4.5 -1,-4.5 -1,4.5 -23,4.5 -23,-4.5 ; 1,-4.5 23,-4.5 23,4.5 1,4.5 1,-4.5 ; 25,-4.5 47,-4.5 47,4.5 25,4.5 25,-4.5 ; 49,-4.5 71,-4.5 71,4.5 49,4.5 49,-4.5 ; 73,-4.5 95,-4.5 95,4.5 73,4.5 73,-4.5 ; 97,-4.5 119,-4.5 119,4.5 97,4.5 97,-4.5 ; 121,-4.5 143,-4.5 143,4.5 121,4.5 121,-4.5
Mechanical 1:
  the board outline again, w0.254